# EAGLE board ultra sensor (EAGLE 9.7.0)

Size 165.43 x 143.45 mm. Coordinates in mm from the lower left corner, seen from the top.
Outline: 0,0 165.43,0 165.43,143.46 0,143.46 0,0
Copper layers (1*16): Top 0.035mm / dielectric 1.5mm / Bottom 0.035mm
Design rules "default": minimum track width 6mil, minimum drill 0.35mm, track to track 6mil, track to pad 6mil, pad to pad 6mil, via to via 6mil, smd to smd 6mil, copper to edge 40mil, drill to drill 6mil, minimum pad ring 10mil, minimum via ring 8mil, stop-mask expansion 4mil, vias tented up to drill 0mil, thermal gap 10mil

## Footprints (pad centres in the part's own frame; a part is rotated, then mirrored left to right if it is on the bottom)
LEDRD254W60D565H860B = drill 0.981 pad 1.581: 1 -1.27,0; 2 1.27,0
HC-SR04 = drill 1.016 long: 1 -3.81,0; 2 -1.27,0; 3 1.27,0; 4 3.81,0
RESAD1016W63L850D250B = drill 0.83 pad 1.43: 1 -5.08,0; 2 5.08,0
ARDUINO-UNO-R3-SHIELD = drill 1.016 pad 1.88: 3.3V 24.13,-2.54; 5V 24.13,0; A0 24.13,12.7; A1 24.13,15.24; A2 24.13,17.78; A3 24.13,20.32; A4 24.13,22.86; A5 24.13,25.4; AREF -24.13,-13.97; D2 -24.13,20.32; D3 -24.13,17.78; D4 -24.13,15.24; D5 -24.13,12.7; D6 -24.13,10.16; D7 -24.13,7.62; D8 -24.13,3.81; D9 -24.13,1.27; D10 -24.13,-1.27; D11 -24.13,-3.81; D12 -24.13,-6.35; D13 -24.13,-8.89; GND@0 24.13,2.54; GND@1 24.13,5.08; GND@2 -24.13,-11.43; IOREF 24.13,-7.62; NC 24.13,-10.16; RES 24.13,-5.08; RX -24.13,25.4; SCL -24.13,-19.05; SDA -24.13,-16.51; TX -24.13,22.86; VIN 24.13,7.62

## Placement (x,y rotation side)
D1  RED  [LEDRD254W60D565H860B]  150.11,15.09 180 top
DIST1  DISTANCE-SENSOR-4PINHC-SR04  [HC-SR04]  130.27,132.62 0 top
DIST2  DISTANCE-SENSOR-4PINHC-SR04  [HC-SR04]  127.25,32.87 0 top
R1  1k  [RESAD1016W63L850D250B]  156.46,12.55 0 top
U1  ARDUINO-UNO-R3-SHIELD  [ARDUINO-UNO-R3-SHIELD]  47.88,113.61 270 top
U2  ARDUINO-UNO-R3-SHIELD  [ARDUINO-UNO-R3-SHIELD]  49.01,29.84 270 top

## Library data of the parts
D1 = Tinkercad; CATEGORY: Opto-Electronic; SUB-CATEGORY: LED; VALUE: LED_RED
DIST1 DIST2 R1 U1 U2 = Tinkercad

## Nets
D1_A: D1.1 R1.1
U1_5V: DIST1.1 DIST1.4 U1.5V
U1_D9: DIST1.2 U1.D9
U1_D10: DIST1.3 U1.D10
U2_5V: DIST2.1 U2.5V
U2_D3: R1.2 U2.D3
U2_D9: DIST2.2 U2.D9
U2_D10: DIST2.3 U2.D10
U2_GND: D1.2 DIST2.4 U2.GND@0 U2.GND@1 U2.GND@2

## Tracks (layer width: path | path; a pad name or v marks a point on that pad's centre or on a via)
D1_A  (1 unrouted)
U1_5V  (2 unrouted)
U1_D9  (1 unrouted)
U1_D10  (1 unrouted)
U2_5V  (1 unrouted)
U2_D3  (1 unrouted)
U2_D9  (1 unrouted)
U2_D10  (1 unrouted)
U2_GND  (4 unrouted)